# EAGLE board pcb_v4.1 (EAGLE 9.7.0)
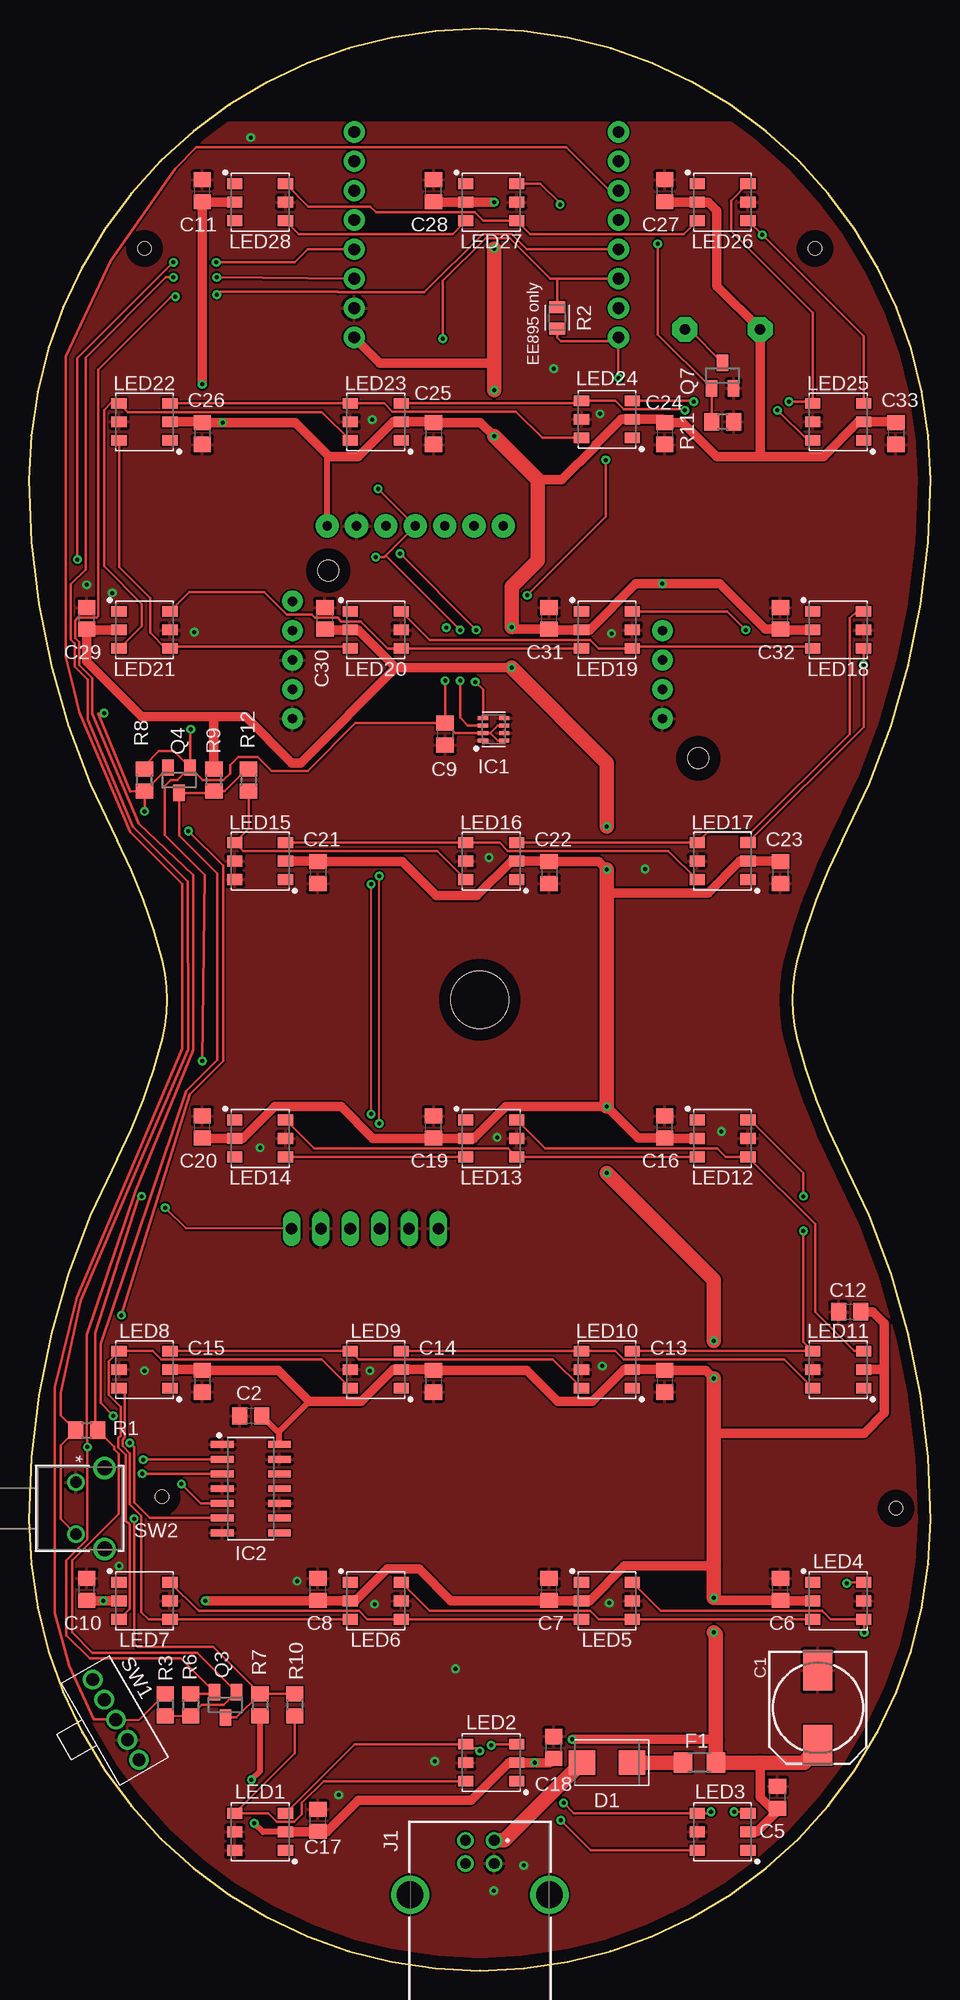
[diagram p0: board, top side]
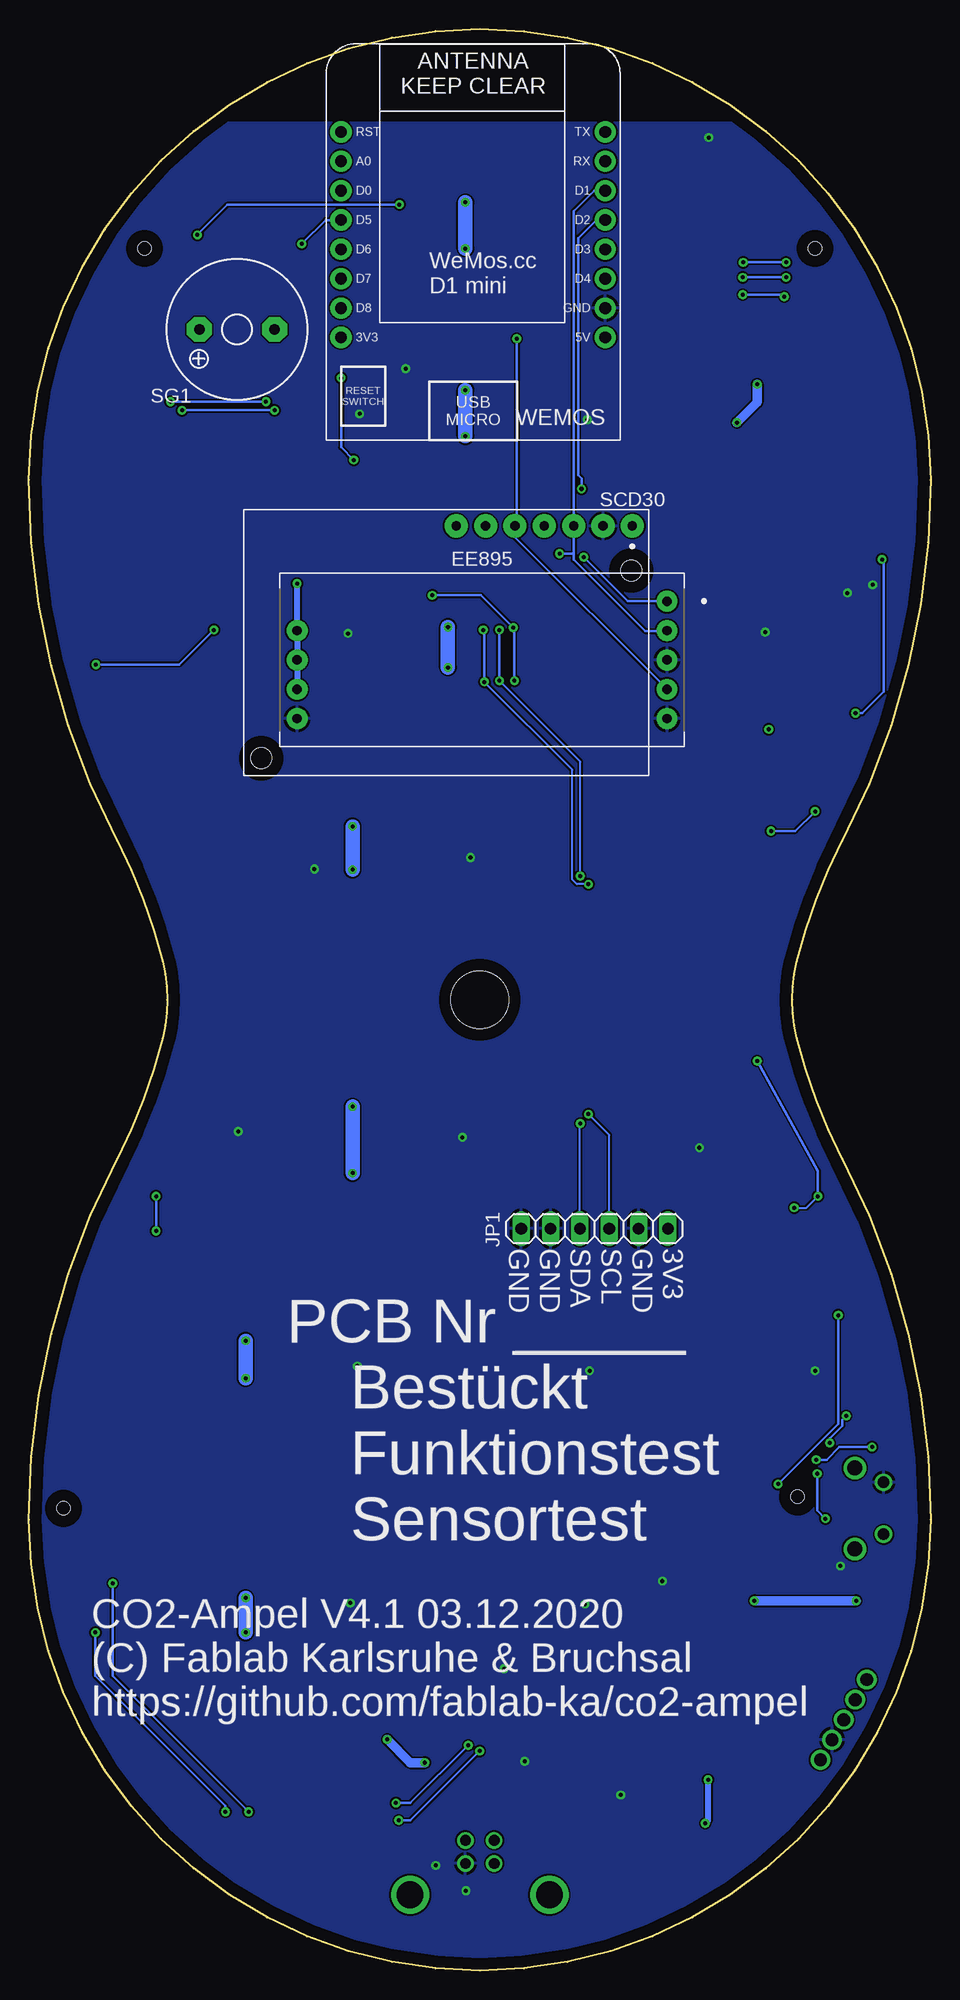
[diagram p1: board, bottom side, seen from below]

Size 78 x 168 mm. Coordinates in mm from the lower left corner, seen from the top.
Outline: 7.62,70.24 arc27 0,39 arc180 78,39 arc27 70.38,70.24 arc-14 66.44,80.68 arc-28 66.44,87.32 arc-14 70.38,97.76 arc27 78,129 arc180 0,129 arc27 7.62,97.76 arc-14 11.56,87.32 arc-28 11.56,80.68 arc-14 7.62,70.24
Copper layers (1*16): Top 0.035mm / dielectric 1.5mm / Bottom 0.035mm
Design rules "default *": minimum track width 6mil, minimum drill 0.35mm, track to track 6mil, track to pad 6mil, pad to pad 6mil, via to via 6mil, smd to smd 6mil, copper to edge 40mil, drill to drill 6mil, minimum pad ring 10mil, minimum via ring 8mil, stop-mask expansion 4mil, vias tented up to drill 0.4mm, thermal gap 10mil
Net classes: 0 default: width 0.152 mm; 1 low_power: width 0.305 mm; 2 high_power: width 0.508 mm
Holes 1.15 mm at 10,149 11.5,41 68,149 75,40
Holes 5 mm at 39,84
tRestrict: area 9,160 to 75,173
bRestrict: area 9,160 to 75,173

## Footprints (pad centres in the part's own frame; a part is rotated, then mirrored left to right if it is on the bottom)
140CLH-0810 = smd 3.5 x 2.5: + 3.25,0; - -3.25,0
C0805 = smd 1.3 x 1.5: 1 -0.95,0; 2 0.95,0
DIOM5336X265N = smd 2.284 x 2.124: 1 -2.164,0; 2 2.164,0
DIP3200W60P254L1500H700Q10A = drill 0.8 pad 1.798: 1 16,5.08; 2 16,2.54; 3 16,0; 4 16,-2.54; 5 16,-5.08; 6 -16,-5.08; 7 -16,-2.54; 8 -16,0; 9 -16,2.54
R1206 = smd 1.6 x 1.803: 1 -1.422,0; 2 1.422,0
SON65P200X250X95-8N = smd 0.879 x 0.382: 1 0.916,0.975; 2 0.916,0.325; 3 0.916,-0.325; 4 0.916,-0.975; 5 -0.916,-0.975; 6 -0.916,-0.325; 7 -0.916,0.325; 8 -0.916,0.975
SOIC127P600X175-14N = smd 1.968 x 0.602: 1 -2.473,3.81; 2 -2.473,2.54; 3 -2.473,1.27; 4 -2.473,0; 5 -2.473,-1.27; 6 -2.473,-2.54; 7 -2.473,-3.81; 8 2.473,-3.81; 9 2.473,-2.54; 10 2.473,-1.27; 11 2.473,0; 12 2.473,1.27; 13 2.473,2.54; 14 2.473,3.81
61400416121 = drill 0.92: 1 1.25,6.74; 2 -1.25,6.74; 3 -1.25,4.74; 4 1.25,4.74 | drill 2.3: S1 -6.02,2.03; S2 6.02,2.03
1X06 = drill 1.016 long: 1 -6.35,0; 2 -3.81,0; 3 -1.27,0; 4 1.27,0; 5 3.81,0; 6 6.35,0
SON160P500X500X150-6N = smd 1.312 x 0.932: 1 -2.2,1.6; 2 -2.2,0; 3 -2.2,-1.6; 4 2.2,-1.6; 5 2.2,0; 6 2.2,1.6
SOT23 = smd 1 x 1.4: 1 -0.95,-1.1; 2 0.95,-1.1; 3 0,1.1
R0805 = smd 1.3 x 1.5: 1 -0.95,0; 2 0.95,0
RESC2012X65 = smd 1.031 x 1.42: 1 -0.919,0; 2 0.919,0
HDRV7W80P254_1X7_1778X254X838B = drill 0.8 pad 1.997: 1 0,0; 2 2.54,0; 3 5.08,0; 4 7.62,0; 5 10.16,0; 6 12.7,0; 7 15.24,0 | hole 1.8: 0.1,3.875; 32.1,20.1
KSS1201 = drill 0.914 pad 2.159 octagon: + 3.251,0; - -3.251,0
HDRRAR5W64P200_1X5_1016X736X556B = drill 1.105 pad 1.705: 1 0,0; 2 2,0; 3 4,0; 4 6,0; 5 8,0
SW2_1825027-E = drill 0.991 pad 1.499: 1 0,0; 2 4.496,0 | drill 1.295 pad 1.803: 3 -1.245,2.489; 4 5.766,2.489
HDRVR8W64P254_1X8_2032X254X850B = drill 1.016 pad 1.829: 3V3 0,0; 5V 0,-22.86; A0 15.24,0; D0 12.7,0; D1 12.7,-22.86; D2 10.16,-22.86; D3 7.62,-22.86; D4 5.08,-22.86; D5 10.16,0; D6 7.62,0; D7 5.08,0; D8 2.54,0; GND 2.54,-22.86; RESET 17.78,0; RX 15.24,-22.86; TX 17.78,-22.86

## Placement (x,y rotation side)
C1  1m  [140CLH-0810]  68.25,22.75 270 top
C2  100n  [C0805]  19.2,48 180 top
C5  100n  [C0805]  64.75,15 90 top
C6  100n  [C0805]  65,33 90 top
C7  100n  [C0805]  45,33 90 top
C8  100n  [C0805]  25,33 90 top
C9  100n  [C0805]  36,107 270 top
C10  100n  [C0805]  5,33 90 top
C11  100n  [C0805]  15,154 90 top
C12  100n  [C0805]  71,57 180 top
C13  100n  [C0805]  55,51 270 top
C14  100n  [C0805]  35,51 270 top
C15  100n  [C0805]  15,51 270 top
C16  100n  [C0805]  55,73 90 top
C17  100n  [C0805]  25,13 90 top
C18  100n  [C0805]  45.4,19.3 90 top
C19  100n  [C0805]  35,73 90 top
C20  100n  [C0805]  15,73 90 top
C21  100n  [C0805]  25,95 270 top
C22  100n  [C0805]  45,95 270 top
C23  100n  [C0805]  65,95 270 top
C24  100n  [C0805]  55,133 270 top
C25  100n  [C0805]  35,133 270 top
C26  100n  [C0805]  15,133 270 top
C27  100n  [C0805]  55,154 90 top
C28  100n  [C0805]  35,154 90 top
C29  100n  [C0805]  5,117 90 top
C30  100n  [C0805]  25.6,117 90 top
C31  100n  [C0805]  45,117 90 top
C32  100n  [C0805]  65,117 90 top
C33  100n  [C0805]  75,133 270 top
D1  SS24  [DIOM5336X265N]  50,18 180 top
EE895  EE895  [DIP3200W60P254L1500H700Q10A]  38.8,113.4 0 bottom
F1  1206L110THYR  [R1206]  58,18 0 top
IC1  BMP280  [SON65P200X250X95-8N]  40.2,107.4 180 top
IC2  SN74AHCT125  [SOIC127P600X175-14N]  19.2,41.7 0 top
J1  C46392  [61400416121]  39,4.53 0 top
JP1  PINHD-1X6  [1X06]  29.07,64.2 180 bottom
LED1  WS2813  [SON160P500X500X150-6N]  20,12 180 top
LED2  WS2813  [SON160P500X500X150-6N]  40,18 180 top
LED3  WS2813  [SON160P500X500X150-6N]  60,12 180 top
LED4  WS2813  [SON160P500X500X150-6N]  70,32 0 top
LED5  WS2813  [SON160P500X500X150-6N]  50,32 0 top
LED6  WS2813  [SON160P500X500X150-6N]  30,32 0 top
LED7  WS2813  [SON160P500X500X150-6N]  10,32 0 top
LED8  WS2813  [SON160P500X500X150-6N]  10,52 180 top
LED9  WS2813  [SON160P500X500X150-6N]  30,52 180 top
LED10  WS2813  [SON160P500X500X150-6N]  50,52 180 top
LED11  WS2813  [SON160P500X500X150-6N]  70,52 180 top
LED12  WS2813  [SON160P500X500X150-6N]  60,72 0 top
LED13  WS2813  [SON160P500X500X150-6N]  40,72 0 top
LED14  WS2813  [SON160P500X500X150-6N]  20,72 0 top
LED15  WS2813  [SON160P500X500X150-6N]  20,96 180 top
LED16  WS2813  [SON160P500X500X150-6N]  40,96 180 top
LED17  WS2813  [SON160P500X500X150-6N]  60,96 180 top
LED18  WS2813  [SON160P500X500X150-6N]  70,116 0 top
LED19  WS2813  [SON160P500X500X150-6N]  50,116 0 top
LED20  WS2813  [SON160P500X500X150-6N]  30,116 0 top
LED21  WS2813  [SON160P500X500X150-6N]  10,116 0 top
LED22  WS2813  [SON160P500X500X150-6N]  10,134 180 top
LED23  WS2813  [SON160P500X500X150-6N]  30,134 180 top
LED24  WS2813  [SON160P500X500X150-6N]  50,134.22 180 top
LED25  WS2813  [SON160P500X500X150-6N]  70,134 180 top
LED26  WS2813  [SON160P500X500X150-6N]  60,153 0 top
LED27  WS2813  [SON160P500X500X150-6N]  40,153 0 top
LED28  WS2813  [SON160P500X500X150-6N]  20,153 0 top
Q3  DMG2302UK-7  [SOT23]  17,23 180 top
Q4  DMG2302UK-7  [SOT23]  13,103 180 top
Q7  DMG2302UK-7  [SOT23]  60,138 0 top
R1  4.7k  [R0805]  5,46.75 0 top
R2  4,7k  [RESC2012X65]  45.7,143 270 top
R3  4.7k  [R0805]  11.8,23 270 top
R6  4.7k  [R0805]  14,23 270 top
R7  1k  [R0805]  20,23 270 top
R8  4.7k  [R0805]  10,103 90 top
R9  1k  [R0805]  16,103 90 top
R10  470R  [R0805]  23,23 270 top
R11  4.7k  [R0805]  60,134 180 top
R12  470R  [R0805]  19,103 270 top
SCD30  SDC30  [HDRV7W80P254_1X7_1778X254X838B]  25.8,125 180 bottom
SG1  YS-MBZ12085C05R42  [KSS1201]  60,142 180 bottom
SW1  SWITCH_1X1  [HDRRAR5W64P200_1X5_1016X736X556B]  5.52,25.17 300 top
SW2  1-1825027-4  [SW2_1825027-E]  4.06,42.25 270 top
WEMOS  WEMOS_D1_MINI  [HDRVR8W64P254_1X8_2032X254X850B]  51,141.31 90 bottom

## Library data of the parts
C1 C2 C5-C33 = rcl; SPICEPREFIX: C
D1 = Diode; CATEGORY: Diode; SUB-CATEGORY: Rectifier
EE895 IC1 IC2 LED1-LED28 SCD30 = SCD30
F1 R1 R3 R6-R12 = rcl; SPICEPREFIX: R
J1 = Wurth_Connectors_WR-USB; APPLICATION: USB 2.0; DATASHEET-URL: https://www.we-online.com/catalog/datasheet/61400416121.pdf; GERDER: Female; INTERFACE-TYPE: Type B; IR1: 1.5A; MOUNT: THT; PACKAGING: Tray; PART-NUMBER: 61400416121; PINS: 4; TYPE: Horizontal; WORKING-VOLTAGE: 30V(AC)
JP1 = Connector; CATEGORY: CONNECTOR; SUB-CATEGORY: PIN-HEADER
Q3 Q4 Q7 = Transistor; CATEGORY: Transistor; SUB-CATEGORY: MOSFET; TYPE: N-Channel
R2 = Resistor; CATEGORY: Resistor; SUB-CATEGORY: Fixed
SG1 = buzzer; OC_FARNELL: unknown; OC_NEWARK: unknown
SW1 = Switches
SW2 = Switches; BUILT_BY: EMA_UL_Team; CATEGORY: Tactile Switches; CONFIGURATION__POLE-THROW_: Single Pole - Single Throw; CONTACT_CURRENT_RATING: 50; COPYRIGHT: Copyright (C) 2016 Accelerated Designs. All rights reserved; DESCRIPTION: FSMRA5JH04=R/A,TACT PB SW,160G; MANUFACTURER_PART_NUMBER: 1-1825027-4; MAX_SWITCHING_CURRENT: -; MAX_SWITCHING_VOLTAGE_AC_: -; PART_STATUS: active; PRODUCT_TYPE: Switch; SERIES: Unknown; SWITCH_TYPE: Tactile Switches; TE_INTERNAL_NUMBER: 1-1825027-4; TE_PART_NUMBER: 1-1825027-4; VENDOR: TE Connectivity; VOLTAGE_RATING: -
WEMOS = Wemos D1 mini

## Nets
+3V3: C9.1 IC1.2 IC1.6 IC1.8 JP1.1 Q3.1 Q4.1 R1.2 R2.2 R3.2 R6.2 R8.2 WEMOS.3V3
+5V [high_power]: C1.+ C2.1 C5.1 C6.1 C7.1 C8.1 C10.1 C11.1 C12.1 C13.1 C14.1 C15.1 C16.1 C17.1 C18.1 C19.1 C20.1 C21.1 C22.1 C23.1 C24.1 C25.1 C26.1 C27.1 C28.1 C29.1 C30.1 C31.1 C32.1 C33.1 EE895.7 EE895.8 EE895.9 F1.2 IC2.14 LED1.2 LED2.2 LED3.2 LED4.2 LED5.2 LED6.2 LED7.2 LED8.2 LED9.2 LED10.2 LED11.2 LED12.2 LED13.2 LED14.2 LED15.2 LED16.2 LED17.2 LED18.2 LED19.2 LED20.2 LED21.2 LED22.2 LED23.2 LED24.2 LED25.2 LED26.2 LED27.2 LED28.2 R7.2 R9.2 SCD30.1 SG1.+ WEMOS.5V
BUZZ_EN: R3.1 SW1.3 WEMOS.D0
BUZZER: Q7.1 R11.2 WEMOS.D5
GND [high_power]: C1.- C2.2 C5.2 C6.2 C7.2 C8.2 C9.2 C10.2 C11.2 C12.2 C13.2 C14.2 C15.2 C16.2 C17.2 C18.2 C19.2 C20.2 C21.2 C22.2 C23.2 C24.2 C25.2 C26.2 C27.2 C28.2 C29.2 C30.2 C31.2 C32.2 C33.2 EE895.3 EE895.5 EE895.6 IC1.1 IC1.5 IC1.7 IC2.1 IC2.4 IC2.7 IC2.10 IC2.13 J1.4 JP1.2 JP1.5 JP1.6 LED1.5 LED1.6 LED2.5 LED3.5 LED4.5 LED5.5 LED6.5 LED7.5 LED8.5 LED9.5 LED10.5 LED11.5 LED12.5 LED13.5 LED14.5 LED15.5 LED15.6 LED16.5 LED17.5 LED18.5 LED19.5 LED20.5 LED21.5 LED22.5 LED23.5 LED24.5 LED25.5 LED26.5 LED27.5 LED28.5 Q7.2 R11.1 SCD30.2 SW1.4 SW2.1 WEMOS.GND
LED_DATA_1: IC2.2 Q3.2 R6.1 WEMOS.D6
LED_DATA_2: IC2.5 Q4.2 R8.1 WEMOS.D3
N$2: IC2.3 Q3.3 R7.1 R10.1
N$4: LED2.3 LED3.4 LED4.6
N$5: LED1.3 LED2.4 LED3.6
N$7: LED4.3 LED5.4 LED6.6
N$8 [high_power]: D1.1 F1.1
N$9: LED3.3 LED4.4 LED5.6
N$10: LED8.3 LED9.4 LED10.6
N$11: LED5.3 LED6.4 LED7.6
N$12: LED6.3 LED7.4 LED8.6
N$13: LED7.3 LED8.4 LED9.6
N$14: LED16.3 LED17.4 LED18.6
N$15: LED9.3 LED10.4 LED11.6
N$16: LED10.3 LED11.4 LED12.6
N$17: LED11.3 LED12.4 LED13.6
N$18: LED12.3 LED13.4 LED14.6
N$19: LED13.3 LED14.4
N$20: LED15.4 LED16.6 R12.2
N$21: LED15.3 LED16.4 LED17.6
N$22: LED24.3 LED25.4 LED26.6
N$23 [high_power]: D1.2 J1.1
N$24: LED17.3 LED18.4 LED19.6
N$25: LED18.3 LED19.4 LED20.6
N$26: LED19.3 LED20.4 LED21.6
N$27: LED20.3 LED21.4 LED22.6
N$28: LED21.3 LED22.4 LED23.6
N$29: LED22.3 LED23.4 LED24.6
N$30: LED23.3 LED24.4 LED25.6
N$32: Q7.3 SG1.-
N$33: LED25.3 LED26.4 LED27.6
N$34: LED26.3 LED27.4 LED28.6
N$35: LED27.3 LED28.4
PWM: SCD30.6
RDY: EE895.4 R2.1 SCD30.5 WEMOS.D7
SCHALTER: R1.1 SW2.2 WEMOS.D4
SCL: EE895.2 IC1.4 JP1.3 SCD30.3 WEMOS.D1
SCL1: LED1.4 LED2.6 R10.2
SCL2: IC2.6 Q4.3 R9.1 R12.1
SDA: EE895.1 IC1.3 JP1.4 SCD30.4 WEMOS.D2

## Tracks (layer width: path | path; a pad name or v marks a point on that pad's centre or on a via)
+3V3  (via drill 0.35)
  Top 0.152: R3.2 R6.2 | JP1.1 13.6,64.2 v11.8,66
  Top 0.203: R6.2 14.95,23 16.85,23 Q3.1 14.55,27.5 5.5,27.5 3.75,29.25 3.75,35.5 7.78,39.53 7.78,44.71 7.39,45.11 7.39,45.31 R1.2 5.75,46.95 5.75,55.19 9.41,66.66 v9.75,67 | v15,78.7 15.22,94.78 11.75,98.25 11.75,102.5 12.25,103 12.85,103 Q4.1 | R8.2 10,104.25 11.25,105.5 12.55,105.5 Q4.1 | Q4.1 13.95,107.35 v14,107.4 | C9.1 v36,111.6 | v51,137.8 WEMOS.3V3 50.69,141 46,141 45.7,141.3 R2.2 | v49.9,130.7 49.9,125.8 v43.1,119 | C9.1 36.88,107.08 IC1.2 39.92,107.08 | IC1.8 40.58,106.42 39.92,107.08 | IC1.6 40.58,107.72 39.92,107.08 | C9.1 28.25,107.95 24.1,103.8 21,103.8 19.8,105 18.1,105 17.4,104.3 17.4,103.59 16.81,103 15.05,103 Q4.1
  Bottom 0.152: v11.8,66 10.75,66 v9.75,67
  Bottom 0.203: v15,78.7 9.75,69.2 v9.75,67 | v36,111.6 36,116.1 v36.1,116.2 38.9,119 v43.1,119 | v51,137.8 51,131.8 v49.9,130.7
+5V  (via drill 0.35)
  Top 0.508: LED1.2 20.25,12 v19.5,12.75 | v19.25,16.5 20,17.25 R7.2 | SCD30.1 25.8,130.8 26,131 | IC2.14 21.67,46.67 | 21.67,46.67 24.25,49.25 | C2.1 21.48,46.67 21.67,46.67
  Top 0.813: LED1.2 24.95,12 C17.1 25.7,12.05 25.75,12 28.5,14.75 38.25,14.75 41.5,18 LED2.2 v43.75,18 45.05,18 C18.1 | C5.1 64.47,13.78 | LED3.2 62.95,12 64.6,13.65 64.47,13.78 | LED4.2 65.05,32 C6.1 59.45,32.05 v59.25,32.25 | LED7.2 v6.45,32 5.05,32 C10.1 | LED12.2 55.05,72 C16.1 52.7,72.05 v50,74.75 41.25,74.75 38.5,72 LED13.2 35.05,72 | 35.05,72 C19.1 | C20.1 15.05,72 LED14.2 18.5,72 21.25,74.75 27,74.75 29.75,72 35.05,72 | LED15.2 24.95,96 C21.1 32.3,95.95 35.25,93 38.75,93 41.75,96 LED16.2 44.95,96 C22.1 49.3,95.95 v50,95.25 | C23.1 64.95,96 LED17.2 61.5,96 58.75,93.25 50,93.25 | LED18.2 65.05,116 C32.1 63.7,116.05 59.75,120 v54.8,120 52.5,120 48.5,116 LED19.2 45.05,116 C31.1 41.95,116.05 v41.75,116.25 | C30.1 25.65,116 LED20.2 28.5,116 31.75,112.75 | LED21.2 5.05,116 C29.1 5,113.25 9.75,108.5 16,108.5 | LED22.2 14.95,134 C26.1 v16.75,133.95 23.05,133.95 26,131 28.5,131 31.5,134 LED23.2 34.95,134 C25.1 39.05,133.95 v40.25,132.75 | C33.1 74.95,134 LED25.2 71.75,134 68.75,131 63.25,131 | C27.1 55.05,153 LED26.2 58.75,153 59.5,152.25 59.5,145.75 SG1.+ 63.25,131 | C28.1 35.05,153 LED27.2 v40.25,153 | LED28.2 15.05,153 C11.1 v15,137.25 | 74,52 74,56 73,57 C12.1 | LED8.2 14.95,52 C15.1 21.55,51.95 24.25,49.25 28.75,49.25 31.5,52 LED9.2 34.95,52 C14.1 43.05,51.95 45.75,49.25 48.75,49.25 51.5,52 LED10.2 54.95,52 C13.1 58.55,51.95 v59.25,51.25 | 44,129 46.09,129 49.02,131.92 49.02,132.01 51.22,134.22 LED24.2 54.83,134.22 C24.1 56.55,133.95 59.5,131 63.25,131 | 31.75,112.75 v41.75,112.75 | 59.25,35 51.5,35 48.5,32 LED5.2 45.05,32 C7.1 44.95,32 36.5,32 33.75,34.75 31,34.75 28.25,32 LED6.2 25.05,32 C8.1 24.95,32 v15.25,32
  Top 0.813: 63.25,18 63.25,15 64.47,13.78 | 59.42,20 v47,20 | 16,108.5 18.75,108.5 22.75,104.5 23.5,104.5 31.75,112.75 | R9.2 16,108.5 | 74,52 74,48.25 72.25,46.5 59.25,46.5 | LED11.2 74,52 | WEMOS.5V 30.35,139.1 40.25,139.1
  Top 1.27: C1.+ 67.05,18 63.25,18 F1.2 59.42,20 59.42,29.08 v59.25,29.25 | v59.25,32.25 59.25,35 59.25,46.5 v59.25,51.25 | v59.25,54.5 59.25,59.75 v50,69 | v50,74.75 50,93.25 v50,95.25 | v50,99 50,104.5 v41.75,112.75 | v41.75,116.25 41.75,119.75 44,122 44,129 v40.25,132.75 | v40.25,136.75 40.25,139.1 v40.25,149
  Bottom 0.508: v19.5,12.75 19.25,13 v19.25,16.5 | EE895.7 EE895.8 EE895.9 v54.8,120
  Bottom 0.813: v15,137.25 15,135.7 v16.75,133.95 | v15.25,32 v6.45,32 | v47,20 45,18 v43.75,18
  Bottom 1.27: v59.25,29.25 v59.25,32.25 | v59.25,51.25 v59.25,54.5 | v50,69 v50,74.75 | v50,95.25 v50,99 | v41.75,112.75 v41.75,116.25 | v40.25,132.75 v40.25,136.75 | v40.25,149 v40.25,153
BUZZ_EN
  Top 0.152: SW1.3 9.56,21.71 R3.1
  Top 0.203: SW1.3 7.48,21.75 5.63,21.75 3.47,26.37 2.25,30.94 2.25,50.44 4.15,58.22 13.25,79.78 13.25,94 8.75,98.5 4.36,108.9 3.92,110.7 3.2,113.66 3.2,139.64 7.08,147.96 12.64,155.9 14.49,157.75 46.5,157.75 50.25,154 WEMOS.D0
BUZZER  (via drill 0.35)
  Top 0.203: R11.2 Q7.1 54.4,141.55 v54.4,149.4
  Bottom 0.203: v54.4,149.4 52.33,151.47 WEMOS.D5
GND  (via drill 0.35)
  other vias: 42.8,9.1 40.2,6.9 36.9,26.1 29.5,51.9 49.6,52.3 50.2,31.8 26.8,15.2 29.9,31.7 40.5,72.1 39.8,96.3 7.2,119.2 5,119.9 29.7,134.2 49.4,134.7 45.4,138.6 19.2,158.6 53.3,95.3 50.4,115.7 23.2,33.7 7.8,35 20,71.2 59.9,72.6 10,51.9 35.1,18.1 14.3,115.8
  pour Top: -9.92,169.92 -9.92,-11.13 92.41,-9.92 92.41,169.92
  pour Bottom: -8.23,178.16 -9.92,-9.92 89.92,-9.92 89.92,177.48
LED_DATA_1  (via drill 0.35)
  Top 0.203: R6.1 15.9,23.95 Q3.2 13.15,27 5.25,27 3.25,29 3.25,35.5 5.07,37.32 v5.07,45.3 5.07,45.87 5,45.94 5,55 9.25,67.5 14.2,79.66 14.2,94.78 9.5,99.25 5.5,108.75 5.5,111.82 4.34,112.98 4.34,114.95 4,115.3 4,116.81 4.24,117.05 5.86,117.05 6,117.19 6,118.7 6,118.71 6,138.52 12.31,144.83 v12.67,144.83 | v16.25,145 16.5,145.25 26.71,145.25 26.74,145.22 34.22,145.22 39.26,150.26 41.75,150.26 43.08,148.93 WEMOS.D6 | IC2.2 9.94,44.24 v9.9,44.2
  Bottom 0.203: v16.25,145 12.84,145 v12.67,144.83 | v9.9,44.2 9,44.2 7.9,45.3 v5.07,45.3
LED_DATA_2  (via drill 0.35)
  Top 0.203: R8.1 Q4.2 | R8.1 8.75,102 6,108.75 v6.5,108.8 | v4.2,122.1 4.2,139.5 v12.5,147.8 | v16.2,147.8 23,147.8 24.13,148.93 WEMOS.D3 | IC2.5 14.86,40.43 v13.19,42.09 | v13.8,98.6 16.8,95.6 16.8,78.7 13.9,75.8 v8,56.7 | v10,100.3 R8.1
  Bottom 0.203: v6.5,108.8 5.9,108.8 4.05,110.65 4.05,121.95 v4.2,122.1 | v12.5,147.8 v16.2,147.8 | v13.19,42.09 8,47.29 v8,56.7 | v13.8,98.6 11.7,98.6 v10,100.3
N$2  (via drill 0.35)
  Top 0.203: R7.1 17.95,21.9 Q3.3 | R10.1 R7.1 | IC2.3 9.83,42.97 v9.8,43 | v9.1,39.1 9.1,28.3 9.4,28 15.95,28 R7.1
  Bottom 0.203: v9.8,43 9.8,39.8 v9.1,39.1
N$4  (via drill 0.35)
  Top 0.203: v46.25,14.5 47.15,13.6 LED3.4 58.85,13.6 v59,13.75 | v40,19.5 40.1,19.6 LED2.3 | v70.75,33.5 70.85,33.6 LED4.6
  Bottom 0.203: v46.25,14.5 45,14.5 v40,19.5 | v59,13.75 70.75,25.5 v70.75,33.5
N$5  (via drill 0.35)
  Top 0.203: LED1.3 28.2,19.6 LED2.4 38.15,19.25 38.75,19.25 v39,19 | LED3.6 48.6,10.4 v46,13
  Bottom 0.203: v46,13 45,13 v39,19
N$7
  Top 0.203: LED4.3 LED5.4 49.28,30.4 48.56,31.12 34.68,31.12 LED6.6
N$8
  Top 1.27: D1.1 F1.1
N$9  (via drill 0.35)
  Top 0.203: LED5.6 54.65,31.15 68.6,31.15 69.35,30.4 LED4.4 72.25,30.35 v72.25,29.25 | v61,13.75 62.05,13.75 LED3.3
  Bottom 0.203: v72.25,29.25 72.25,25.5 61,14.25 v61,13.75
N$10
  Top 0.203: LED8.3 LED9.4 28.52,52.88 45.32,52.88 LED10.6
N$11
  Top 0.203: LED5.3 LED6.4 29.28,30.4 28.56,31.12 14.68,31.12 LED7.6
N$12
  Top 0.203: LED6.3 LED7.4 10.35,30.4 9.73,31.02 9.73,39.36 8.74,40.35 8.74,44.75 8.1,45.4 8.1,45.92 8.29,46.11 8.29,49.91 LED8.6
N$13
  Top 0.203: LED9.6 25.32,52.88 11.44,52.88 10.72,53.6 LED8.4 6.89,52.69 6.89,49.83 7.93,48.79 7.93,46.26 7.74,46.07 7.74,45.25 8.39,44.61 8.39,38.92 8.71,38.6 8.71,31.31 LED7.3
N$14
  Top 0.203: LED16.3 LED17.4 58.7,98.5 62.5,98.5 71,107 71,117 71.6,117.6 LED18.6
N$15
  Top 0.203: LED9.3 LED10.4 50.72,53.6 51.44,52.88 65.32,52.88 LED11.6
N$16  (via drill 0.35)
  Top 0.203: LED10.3 LED11.4 67,54.4 v67,64 | LED12.6 62.4,73.6 67,69 v67,67
  Bottom 0.203: v67,67 v67,64
N$17
  Top 0.203: LED11.3 71.4,53.6 68,57 68,64.6 LED12.4 60.28,70.4 59.56,71.12 44.68,71.12 LED13.6
N$18
  Top 0.203: LED12.3 LED13.4 41.48,71.12 24.68,71.12 LED14.6
N$19
  Top 0.203: LED13.3 LED14.4
N$20
  Top 0.203: R12.2 19,98.8 LED15.4 18.52,96.88 35.32,96.88 LED16.6
N$21
  Top 0.203: LED15.3 LED16.4 40.72,97.6 41.44,96.88 55.32,96.88 LED17.6
N$22  (via drill 0.35)
  Top 0.203: LED24.3 57.43,135.82 v57.5,135.75 | v65.75,135.75 67.65,135.75 LED25.4 67.8,143.45 60.75,150.5 60.75,153.15 LED26.6
  Bottom 0.203: v65.75,135.75 v57.5,135.75
N$23
  Top 1.27: J1.1 41.11,11.27 D1.2
N$24  (via drill 0.35)
  Top 0.203: LED17.3 72.2,107.6 v72.2,113 LED18.4 | LED19.6 60.4,117.6 v62,116
  Bottom 0.203: v62,116 65,113 v72.2,113
N$25
  Top 0.203: LED18.3 67.65,114.55 52.35,114.55 LED19.4 49.28,114.4 48.56,115.12 34.68,115.12 LED20.6
N$26
  Top 0.203: LED19.3 LED20.4 31.03,114.4 28.71,116.72 27.03,116.72 26.7,117.05 24.75,117.05 24.47,117.33 22.32,117.33 20.36,119.29 13.89,119.29 LED21.6
N$27
  Top 0.203: LED20.3 27.65,114.55 12.35,114.55 LED21.4 11.85,114.4 10.5,115.75 10.5,118.75 7.8,121.45 LED22.6
N$28
  Top 0.203: LED21.3 9.75,116.35 9.75,118.25 6.5,121.5 6.5,135 7.1,135.6 LED22.4 8.55,134.85 25.35,134.85 LED23.6
N$29
  Top 0.203: LED22.3 LED23.4 30.72,135.6 31.44,134.88 42.12,134.88 44.38,132.62 LED24.6
N$30  (via drill 0.35)
  Top 0.203: LED23.3 47.58,135.6 LED24.4 50.72,135.82 51.44,135.1 56.65,135.1 v56.75,135 | v64.75,135 67.35,132.4 LED25.6
  Bottom 0.203: v56.75,135 v64.75,135
N$32
  Top 0.203: Q7.3 57.1,142 SG1.-
N$33  (via drill 0.35)
  Top 0.203: LED26.4 v63.42,150.18 72.2,141.4 LED25.3 | LED27.6 44.25,154.6 45.95,152.9 v45.95,152.8
  Bottom 0.203: v45.95,152.8 45.98,152.78 60.83,152.78 v63.42,150.18
N$34
  Top 0.203: LED26.3 56.65,150.25 43.35,150.25 LED27.4 39.28,151.4 38.56,152.12 30.05,152.12 29.54,152.63 24.17,152.63 LED28.6
N$35
  Top 0.203: LED27.3 36.65,150.25 23.35,150.25 LED28.4
RDY  (via drill 0.35)
  Top 0.203: WEMOS.D7 45.7,146.39 | 45.7,146.39 45.11,146.39 41.6,149.9 39.5,149.9 35.8,146.2 v35.8,141.2 | R2.1 45.7,146.39
  Bottom 0.203: EE895.4 35.96,124.02 SCD30.5 35.8,125.16 v35.8,141.2
SCHALTER  (via drill 0.35)
  Top 0.203: SW2.2 2.75,39.06 2.75,45.45 R1.1 2.75,48.05 2.75,50 4.5,58 9.14,68.92 13.76,79.62 13.79,79.68 13.79,80.19 13.75,94.25 9,99 5.1,108.26 5.1,111.71 3.98,112.83 3.98,114.8 3.64,115.15 3.64,119.95 4.9,121.21 4.9,139.55 11.85,146.5 v12.5,146.5 | v16.25,146.5 WEMOS.D4
  Bottom 0.203: v12.5,146.5 v16.25,146.5
SCL  (via drill 0.35)
  Top 0.152: v29.6,74.1 v29.6,94
  Top 0.203: IC1.4 39.28,110.82 v38.6,111.5 | v38.7,116 v32.1,122.6
  Bottom 0.152: JP1.3 27.8,72.3 v29.6,74.1 | v29.6,94 30.6,94 31,94.4 31,103.9 v38.6,111.5
  Bottom 0.203: 30.88,122.6 SCD30.3 30.88,152.22 29.09,154.01 WEMOS.D1 | 30.88,122.6 30.88,122.08 24.7,115.9 22.84,115.9 EE895.2 | v38.6,111.5 38.6,115.9 v38.7,116 | v32.1,122.6 30.88,122.6
SCL1
  Top 0.203: R10.2 23,18.8 LED1.4 20.72,13.6 21.44,12.88 22.96,12.88 23.61,13.53 23.61,14.51 25.5,16.4 LED2.6
SCL2  (via drill 0.35)
  Top 0.203: R12.1 18.85,103.95 16.95,102.05 R9.1 15.85,101.9 Q4.3 13,98.2 16.3,94.9 16.3,78.8 13.62,76.12 6.2,54.21 6.2,49.1 v7.3,48 | IC2.6 10.44,39.16 9.1,40.5 9.1,45.29 v8.73,45.66
  Bottom 0.203: v7.3,48 7.64,47.66 7.64,47.14 8.73,46.05 v8.73,45.66
SDA  (via drill 0.35)
  Top 0.152: v30.3,73.3 v30.3,94.7
  Top 0.203: 30.86,122.44 SCD30.4 30.22,128.2 v30.2,128.2 | 30.86,122.44 30.72,122.3 v30,122.3 | IC1.3 37.98,107.72 37.3,108.4 v37.3,111.6 | v37.3,116 30.86,122.44
  Bottom 0.152: JP1.4 30.34,73.26 v30.3,73.3 | v30.3,94.7 30.3,104.6 v37.3,111.6
  Bottom 0.203: v30,122.3 26.18,118.48 EE895.1 | v30.2,128.2 30.2,129.1 30.5,129.4 30.5,149.9 28.93,151.47 WEMOS.D2 | v37.3,111.6 v37.3,116

## Text on the board
bPlace: 3V3 / GND / SCL / SDA / GND / GND | PCB Nr _____ / □ Bestückt / □ Funktionstest / □ Sensortest | CO2-Ampel V4.1 03.12.2020 / (C) Fablab Karlsruhe & Bruchsal / https://github.com/fablab-ka/co2-ampel
tNames: EE895 only